# Altium PCB FA.PcbDoc
Units mil, origin at the board's own origin, x right, y up, seen from the top; angles counter-clockwise.
Board outline 985.15 x 1183.7 mil, 2 copper layers (Top Layer, Bottom Layer); 23 components, 16 nets, 67 pads, 25 vias.
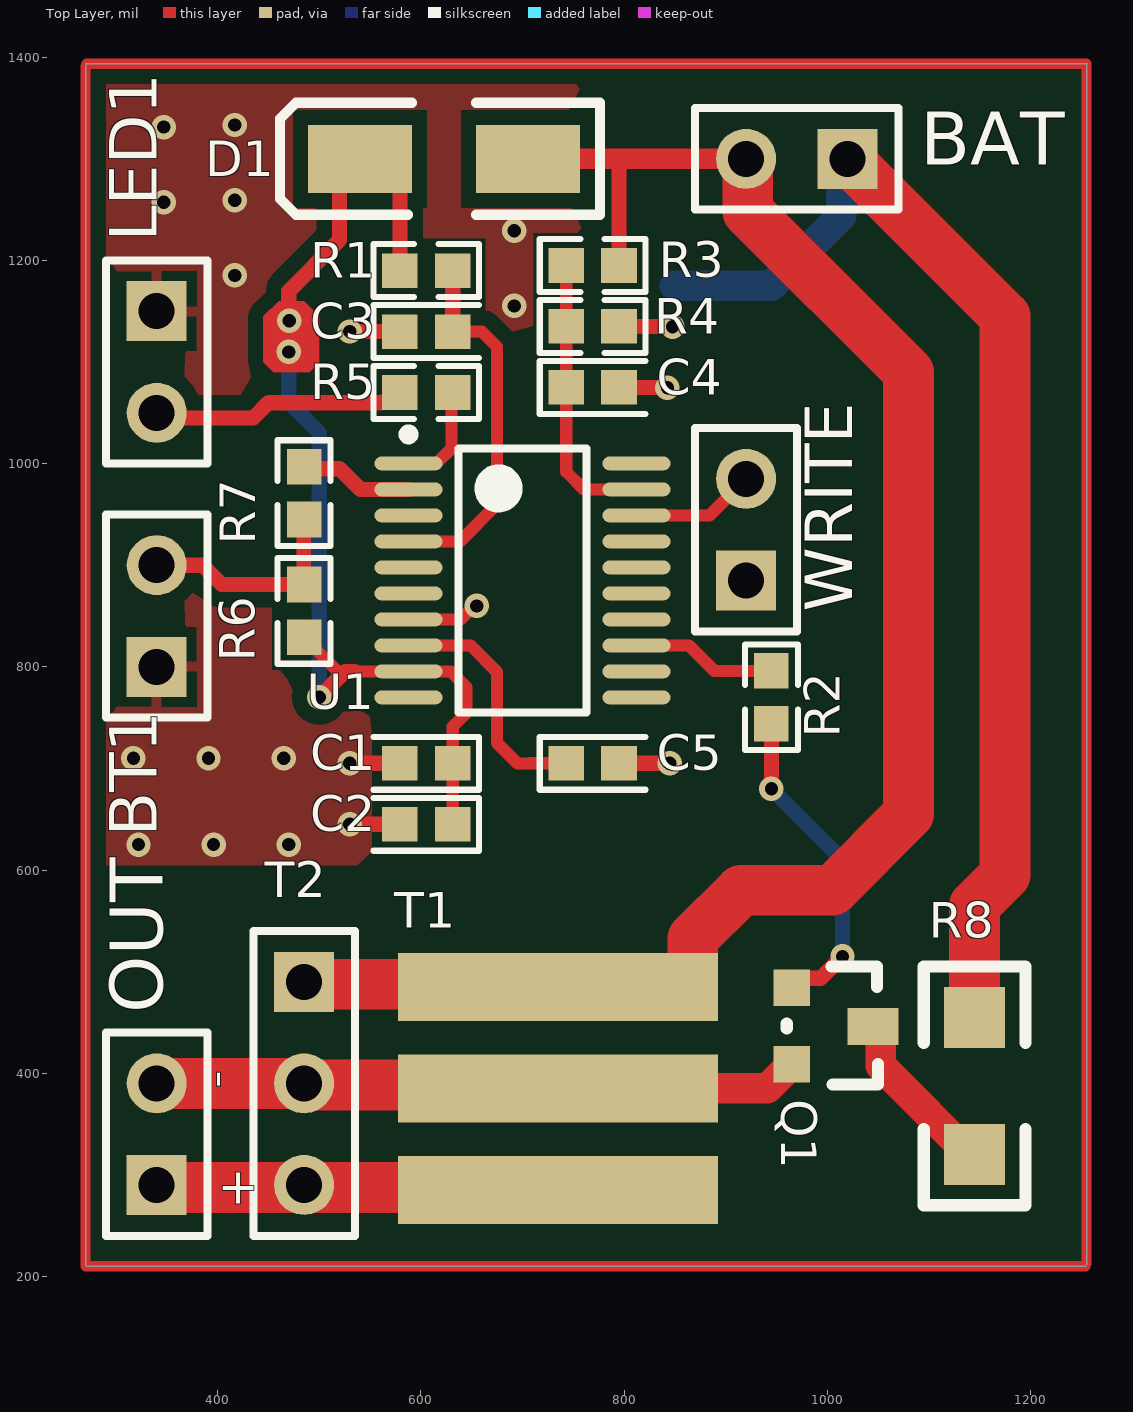
[diagram p0: Top Layer view]
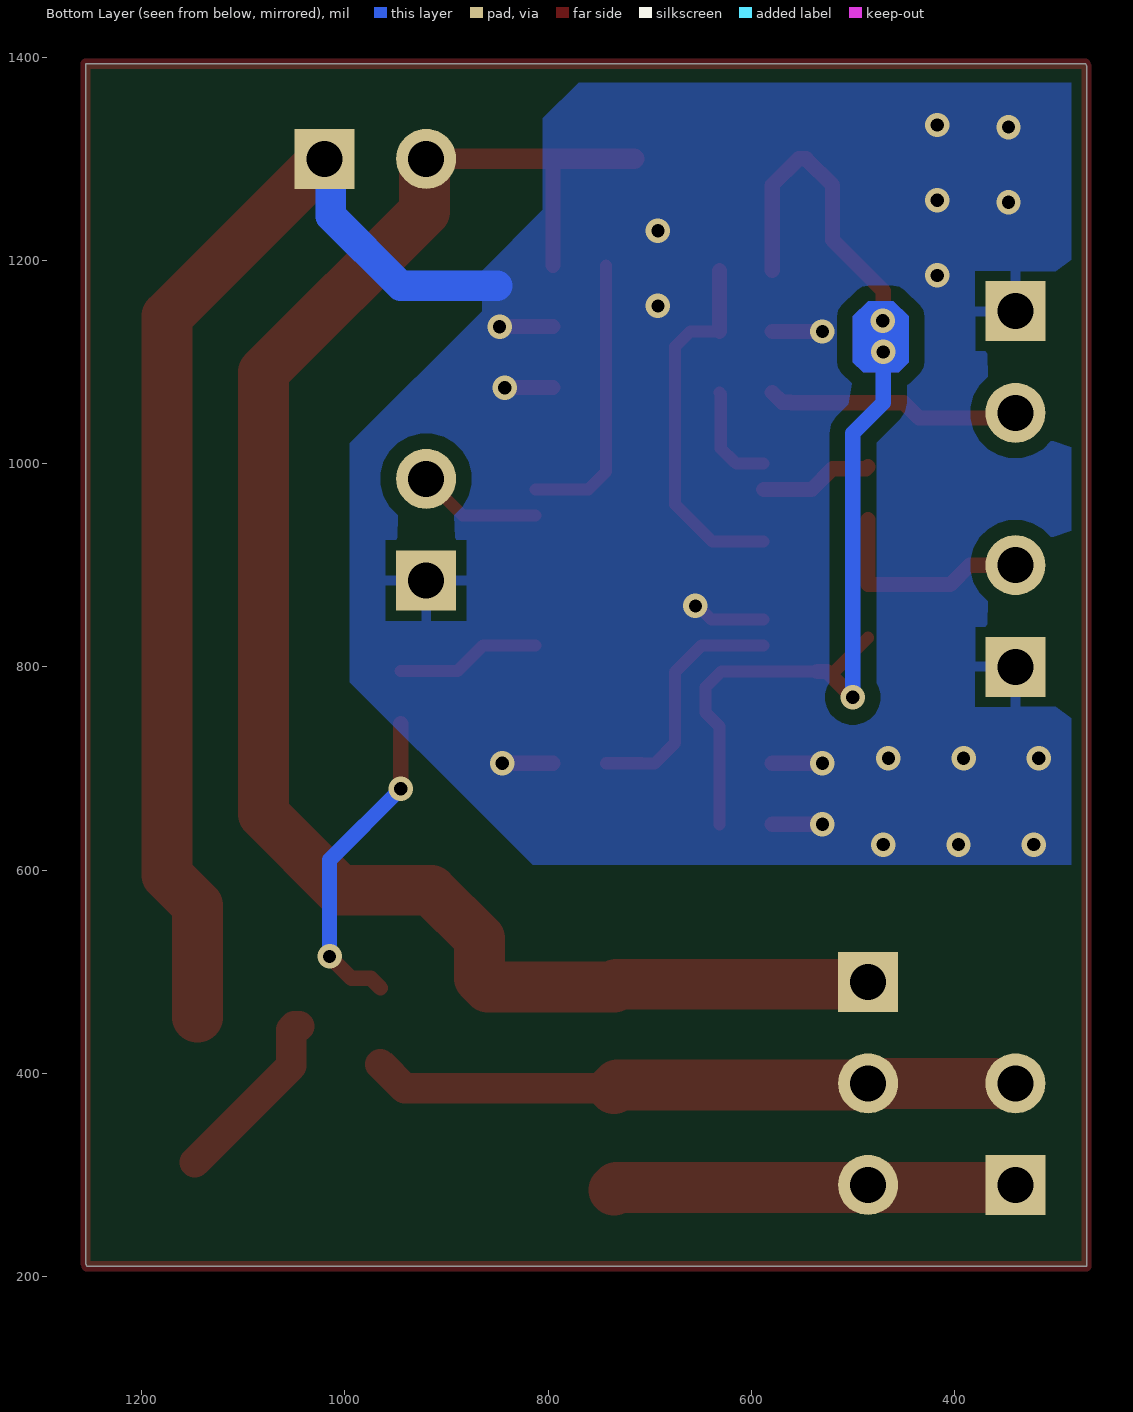
[diagram p1: Bottom Layer view, seen from below]

## Layer stack, top to bottom
Top Solder: solder mask 0.4, Solder Resist, Dk 3.5
Top Layer: signal copper 1.4
Dielectric 1: dielectric 12.6, FR-4, Dk 4.8
Bottom Layer: signal copper 1.4
Bottom Solder: solder mask 0.4, Solder Resist, Dk 3.5

## Board outline
270,210 270,1391.1 270.87,1393.63 1255.12,1393.63 1255.15,1393.7 1255.15,212.6 1254.25,210

## Design rules (kind name [scope] priority, off if disabled: settings)
Clearance [All] p1: gap=10 ignorepadtopadclearanceinfootprint=FALSE except(0: Arc-Hole Track-Hole SMDPad-Hole THPad-Hole Via-Hole Fill-Hole Poly-Hole Region-Hole Text-Hole; 15: Arc-Fill Arc-Poly Arc-Region Track-Fill Track-Poly Track-Region SMDPad-Fill SMDPad-Poly SMDPad-Region THPad-Fill THPad-Poly THPad-Region Via-Fill Via-Poly Via-Region Fill-Fill Fill-Poly Fill-Region Poly-Poly Poly-Region Region-Region)
ComponentClearance [All] p1: gap=1 collisioncheckmode=3 verticalgap=10 showdistances=FALSE
MinimumSolderMaskSliver [All] p1: minsoldermaskwidth=2
PolygonConnect PolygonVia [IsVia] p1: connectstyle=Direct reliefconductorwidth=10 reliefentries=4 polygonreliefangle="90 Angle" airgapwidth=10
PolygonConnect [All] p2: connectstyle=Relief reliefconductorwidth=10 reliefentries=4 polygonreliefangle="90 Angle" airgapwidth=10
RoutingVias [All] p1: holewidth=28 width=50 viastyle="Through Hole" minholewidth=28 minwidth=50 maxholewidth=28 maxwidth=50
SilkToSilkClearance [All] p1: silktosilkclearance=2
SilkToSolderMaskClearance [IsPad] p1: minsilkscreentomaskgap=2 clearancetoexposedcopper=TRUE
SolderMaskExpansion [All] p1: expansion=4 istentingtop=FALSE
Width [All] p1: maxlimit=100 minlimit=8 preferedwidth=30
26 further rules are at their usual default settings.

## Components (designator, comment, footprint, x,y, rotation, side; value= is the part's Value field where it differs from the comment)
BAT "BAT" HDR1X2 1020,1300 r180 top
BT1 "BUTTON" HDR1X2 340,800 r90 top
C1 "0.1uF, 50V" C0603T 631.33,705 r180 top
C2 "2.2uF, 25V" C0603T 631.33,645 r180 top
C3 "0.1uF, 50V" C0603T 579.33,1130 r0 top
C4 "0.1uF, 50V" C0603T 743,1075 r0 top
C5 "2.2uF, 25V" C0603T 743,705 r0 top
D1 "SS36" SMA 705.35,1300 r180 top
LED1 "LED1" HDR1X2 340,1150 r270 top
OUT "OUT" HDR1X2 340,290 r90 top
Q1 "NC( IRF3205PBF)" SOT-23 965,484 r270 top
R1 "10K" R0603T 605.33,1190 r180 top
R2 "10" R0603T 945,770 r90 top
R3 "10K" R0603T 769,1195 r0 top
R4 "10K" R0603T 769,1135 r180 top
R5 "1K" R0603T 605.33,1070 r0 top
R6 "10K" R0603T 485,855 r270 top
R7 "10" R0603T 485,971 r90 top
R8 "0" 1206 1145,455 r270 top
T1 "Header 3" TR-3 698,343 r0 top
T2 "Header 3" HDR1X3 485,490 r270 top
U1 "STM8S003F3P6TR" TSSOP20_N 700,885 r0 top
WRITE "WRITE" HDR1X2 920,885 r90 top

## Footprints (in the part's own frame and the unit in brackets; to place one, negate y for a bottom-side part, rotate by r counter-clockwise, add the part's x,y. Pads: shape width x height; smd on the part's side, far side on the other; paste and mask are expansions set on the pad)
1206 [mil]
  rect 60x60 smd: 1(0,0) 2(135,0)
  silkscreen extent -50,-50 185,50
C0603T [mil]
  rect 35x34 smd: 1(0,0) 2(52,0)
  silkscreen extent -26,-26 78,26
HDR1X2 [mm] "Connector; Header; 2 Position"
  rect 1.5x1.5 hole 0.9: 1(0,0)
  round 1.5 hole 0.9: 2(2.54,0)
  silkscreen extent -1.27,-1.27 3.81,1.27
HDR1X3 [mm] "Connector; Header; 3 Position"
  rect 1.5x1.5 hole 0.9: 1(0,0)
  round 1.5 hole 0.9: 2(2.54,0) 3(5.08,0)
  silkscreen extent -1.27,-1.27 6.35,1.27
R0603T [mil]
  rect 35x34 smd: 1(-26,0) 2(26,0)
  silkscreen extent -52,-26 52,26
SMA [mm]
  rect 2.6x1.7 smd: 1(0,0) 2(4.2,0)
  silkscreen extent -1.8,-1.4 6.2,1.4
SOT-23 [mil]
  rect 36x36 smd: 1(0,0) 2(75,0)
  rect 36x50 smd: 3(38,80)
  silkscreen extent -21,-5 95,85
TR-3 [mil]
  rect 314.96x66.93 smd: 1(37,142) 2(37,42) 3(37,-58)
TSSOP20_N [mm] "TSOP, 20-Leads, Body 6.5x4.4mm, Pitch 0.65mm, IPC Medium Density"
  oval 1.7x0.35 smd: 1(-2.85,2.925) 2(-2.85,2.275) 3(-2.85,1.625) 4(-2.85,0.975) 5(-2.85,0.325) 6(-2.85,-0.325) 7(-2.85,-0.975) 8(-2.85,-1.625) 9(-2.85,-2.275) 10(-2.85,-2.925) 11(2.85,-2.925) 12(2.85,-2.275) 13(2.85,-1.625) 14(2.85,-0.975) 15(2.85,-0.325) 16(2.85,0.325) 17(2.85,0.975) 18(2.85,1.625) 19(2.85,2.275) 20(2.85,2.925)
  silkscreen extent -2.97,-3.3 1.6,3.77, body extent -2.25,-3.3 2.25,3.3, height 1.2

## Part data
BAT BT1 LED1 OUT WRITE: library part "Header 2", "Header, 2-Pin", LatestRevisionDate=17-Jul-2002, LatestRevisionNote="Re-released for DXP Platform.", Publisher="Altium Limited"
C1 C2 C3 C4 C5: library part CAP104
D1: library part Diode, "1N4007", PackageDocument=Sep-1996, Code_JEDEC=DO-214-AB, LatestRevisionDate=17-Jul-2002, LatestRevisionNote="Re-released for DXP Platform.", PackageReference=SMC, Published=8-Jun-2000, Publisher="Altium Limited"
Q1: library part MOSFET-N, "N-Channel MOSFET", LatestRevisionDate=17-Jul-2002, LatestRevisionNote="Re-released for DXP Platform.", PackageDescription="TO, Flat Index; 3 In-Line, Axial Leads; Body Dia. 4.6mm; Lead Dia. 0.5 mm (max)", PackageReference=E3, PackageVersion=1995/1996, Published=8-Jun-2000, Publisher="Altium Limited"
R1 R2 R3 R4 R5 R6 R7 R8: library part Res2, LatestRevisionDate=17-Jul-2002, LatestRevisionNote="Re-released for DXP Platform.", PackageReference=AXIAL-0.4, Published=8-Jun-2000, Publisher="Altium Limited"
T1 T2: "Header, 3-Pin", LatestRevisionDate=17-Jul-2002, LatestRevisionNote="Re-released for DXP Platform.", Publisher="Altium Limited"
U1: library part STM8L101F2P3, "STM8S ARM-based EnergyLite 8-bit MCU", ComponentLink1Description="Manufacturer URL", ComponentLink1URL=http://www.st.com/, ComponentLink2Description="STM8L101 Datasheet", ComponentLink2URL=http://www.st.com/internet/com/TECHNICAL_RESOURCES/TECHNICAL_LITERATURE/DATASHEET/CD00220591.pdf, ComponentLink3Description="STM8L Family Web Page", ComponentLink3URL=http://www.st.com/internet/mcu/subclass/1381.jsp, PackageDescription="20-Pin Thin Shrink Small Package Outline 0.65 mm Pitch", PackageReference=TSSOP20, PackageVersion=2010

## Via types
v1: diameter 24, hole 13, Top Layer to Bottom Layer, 25 vias

## Nets (pads, with @x,y where several pads share a name; then routed paths per layer and width w, separated by ;. In a path a pad name is that pad's centre, name@x,y a point inside that pad or via, vN(x,y) a via of type N, cw(c..) or ccw(c..) an arc to the next point about the centre after c; other vN are vias at no path point)
BAT_VLOTAGE: C4.1 R3.1 R4.2 U1.19 | length 279.4
  Top Layer w12: R3.1 R4.2 C4.1 743,992 760.43,974.57 U1.19
BUTTON1: R7.2 U1.2 | length 112.1
  Top Layer w15: R7.2 487,995 520,995 540.43,974.57 U1.2
GND: BAT.1 BT1.1 C1.2 C2.2 C3.1 C4.2 C5.2 LED1.1 R4.1 R8.1 U1.7 WRITE.1 | length 1541.1
  Top Layer w12: U1.7 639.26,846.61 652.65,860 v1(655,860)
  Top Layer w15: v1(530,645) C2.2 ; v1(530,705) C1.2 ; v1(530,1130) C3.1 ; C5.2 v1(845,705) ; C4.2 v1@840,1075 ; R4.1 v1@847.64,1135
  Top Layer w50: BAT.1 1175,1145 1175,595 1145,565 R8.1
  Bottom Layer w30: 850,1175 945,1175 1013.65,1243.65 1013.65,1293.65 BAT.1
  other v1: 322,625 396,625 470,625 317,710 391,710 465,710 842.64,1074.73 847.64,1134.73 691.85,1155.24 416.85,1185.24 691.85,1229.24 346.85,1257.24 416.85,1259.24 346.85,1331.24 416.85,1333.24
LED1: R5.2 U1.1 | length 103.9
  Top Layer w12: U1.1 614.85,1000.16 615.74,1001.05 616.05,1001.05 630,1015 630,1068.67 R5.2
NetBT1_2: BT1.2 R6.1 R7.1 | length 216.9
  Top Layer w15: BT1.2 385,900 404,881 R6.1 R7.1
NetC3_2: C3.2 R1.1 U1.4 | length 367.3
  Top Layer w12: U1.4 638.39,923.39 675,960 675,1115 660,1130 C3.2
  Top Layer w15: C3.2 R1.1
NetC5_1: C5.1 U1.8 | length 244.3
  Top Layer w12: U1.8 648.98,821.02 675,795 675,725 695.03,704.97 707.47,704.97 ; 707.5,705 C5.1
NetLED1_2: LED1.2 R5.1 | length 251.8
  Top Layer w15: LED1.2 345,1045 435,1045 450,1060 560.54,1060 561.04,1060.5 569.83,1060.5 R5.1
NetQ1_3: Q1.3 R8.2 | length 178.8
  Top Layer w30: Q1.3 1049.82,446 1052.82,443 1052.82,407.18 R8.2@1147.5,312.5
NetR2_2: R2.2 U1.13 | length 143.2
  Top Layer w12: U1.13 863.98,821.02 889,796 R2.2
NetU1_18: U1.18 WRITE.2 | length 122.7
  Top Layer w12: U1.18 883.98,948.98 WRITE.2
OUT+: OUT.1 T1.3 T2.3 | length 397.1
  Top Layer w50: OUT.1 342.5,287.5 732.5,287.5 T1.3
OUT-: OUT.2 Q1.2 T1.2 T2.2 | length 637
  Top Layer w30: T1.2 941,385 Q1.2
  Top Layer w50: OUT.2 T2.2 486.73,388.27 731.73,388.27 T1.2
PWM: Q1.1 R2.1 | length 320.8
  Top Layer w15: v1(945,680) R2.1 ; Q1.1 974.41,493.41 993.41,493.41 v1(1015,515)
  Bottom Layer w15: v1(945,680) 1015,610 v1(1015,515)
VDD: BAT.2 D1.1 R3.2 T1.1 T2.1 | length 1713.7
  Top Layer w15: 790,1300 795,1295 R3.2
  Top Layer w20: D1.1@715,1300 790,1300 BAT.2
  Top Layer w50: T2.1 487.5,487.5 732.5,487.5 T1.1 859.02,485 867.48,493.46 867.48,532.48 915,580 1005,580 1080,655 1080,1090 921.73,1248.27 921.73,1298.27 BAT.2
VDD_CPU: C1.1 C2.1 D1.2 R1.2 R6.2 U1.9 | length 1059.3
  Top Layer w12: R6.2 485,828.5 518.07,795.43 525.43,795.43 ; 535,795.43 U1.9 629.57,795.43 645,780 645,755 631.33,741.33 C2.1
  Top Layer w15: v1(470,1110) 470,1140.68 470,1170 520,1220 520,1274.04 545.96,1300 553.37,1300 579.33,1274.04 R1.2 ; v1(500,770) 525.43,795.43 535,795.43
  Bottom Layer w15: v1(470,1110) 470,1060 500,1030 v1(500,770)
  other v1: 470.48,1140.68
pads on no net: U1.3 U1.5 U1.6 U1.10 U1.11 U1.12 U1.14 U1.15 U1.16 U1.17 U1.20
copper on no net: | length 4330.7
  Top Layer w10: 270,1391.1 270,210 1254.25,210 ; 270.87,1393.63 1255.12,1393.63 ; 1255.15,212.6 1255.15,1393.7

## Polygon pours and split planes (outlines as drawn)
GND on Top Layer "GND_L01_P001" (solid, pour order 1): 283.42,1374.91 283.42,604.91 813.42,604.91 858.42,649.91 948.42,649.91 993.42,694.91 993.42,999.91 863.42,1129.91 863.42,1189.91 803.42,1249.91 803.42,1339.91 765,1374.91
GND on Bottom Layer "GND_L02_P000" (solid, pour order 0): 285,1375 285,605 815,605 860,650 995,785 995,1020 865,1150 865,1190 805,1250 805,1340 770,1375

## Other copper
Top Layer:
  region net VDD_CPU: 460,1160 445,1145 445,1100 455,1090 490,1090 500,1100 500,1145 485,1160
Bottom Layer:
  region net VDD_CPU: 460,1160 445,1145 445,1100 455,1090 490,1090 500,1100 500,1145 485,1160

## Silkscreen, mask and mechanical layers (free items; w line width, h text height)
Top Overlay:
  text "-" at 425.01,385 h60 r90
  text "+" at 400,259.6 h60